# EAGLE board boardTracesBottom (EAGLE 9.4.1)
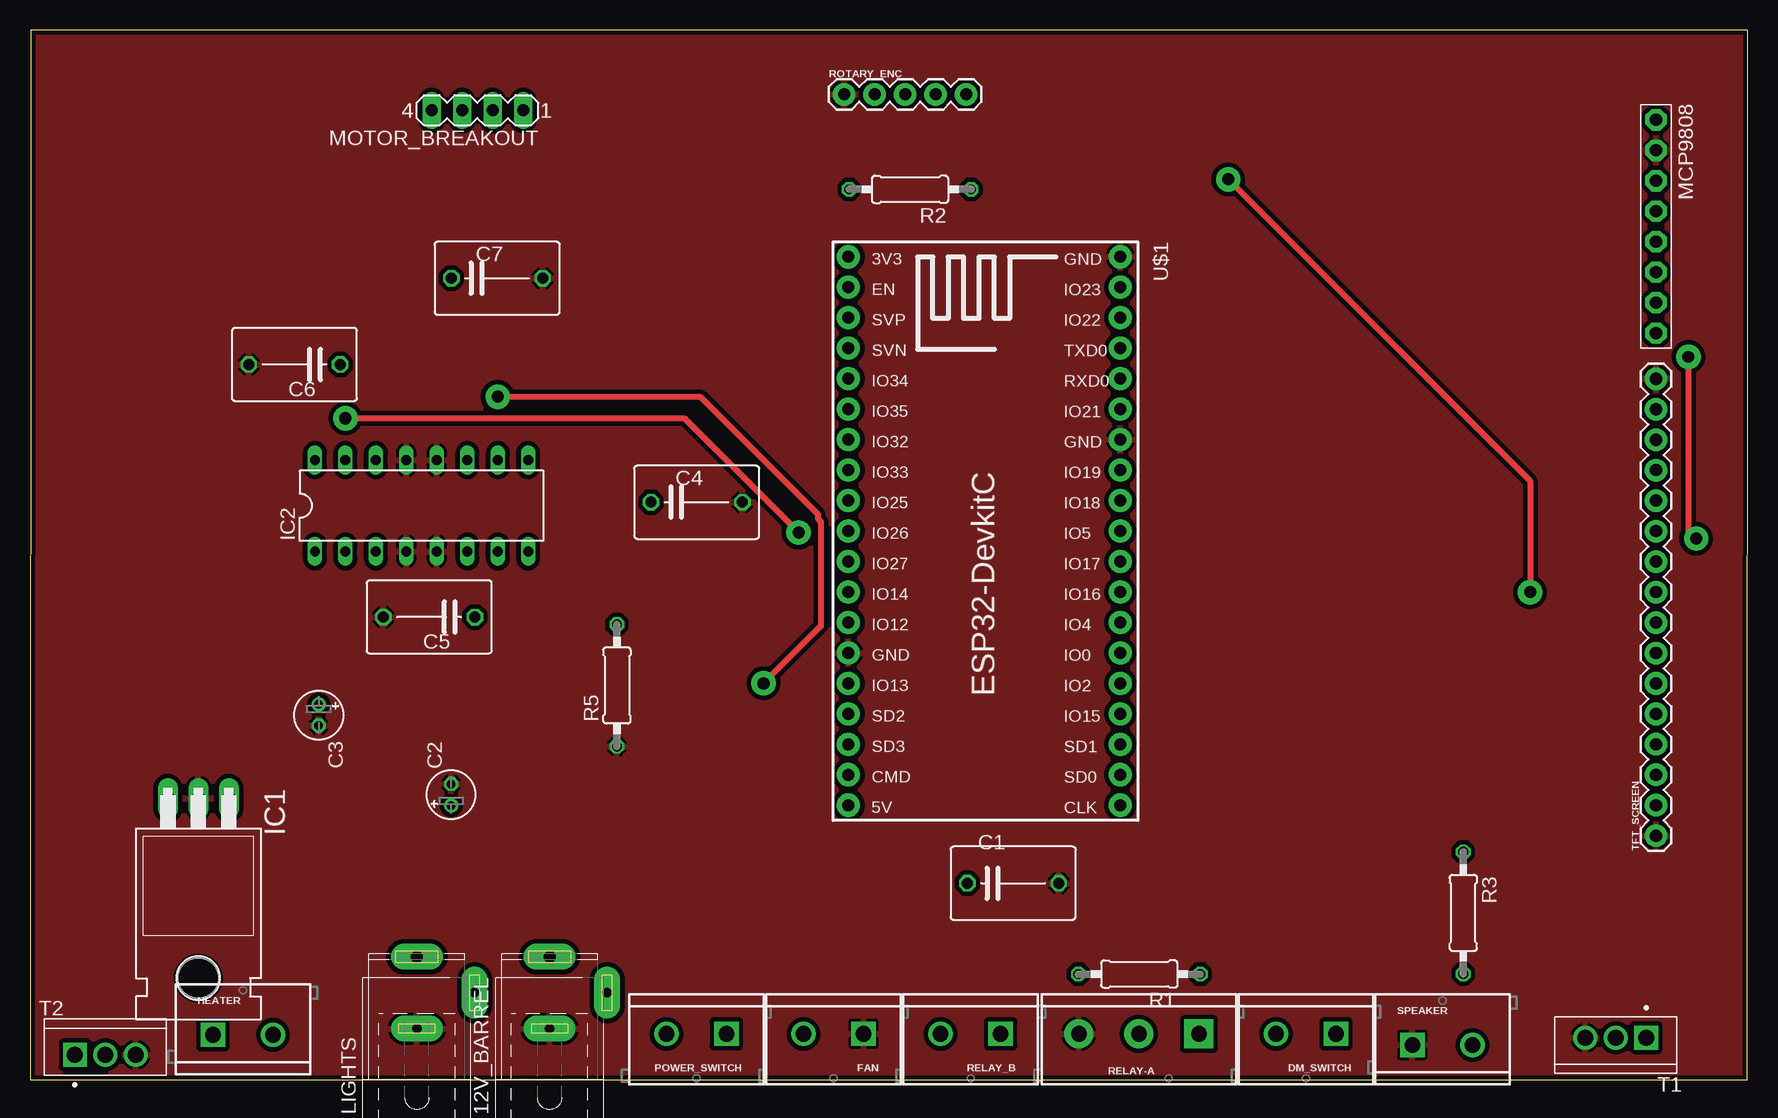
[diagram p0: board, top side]
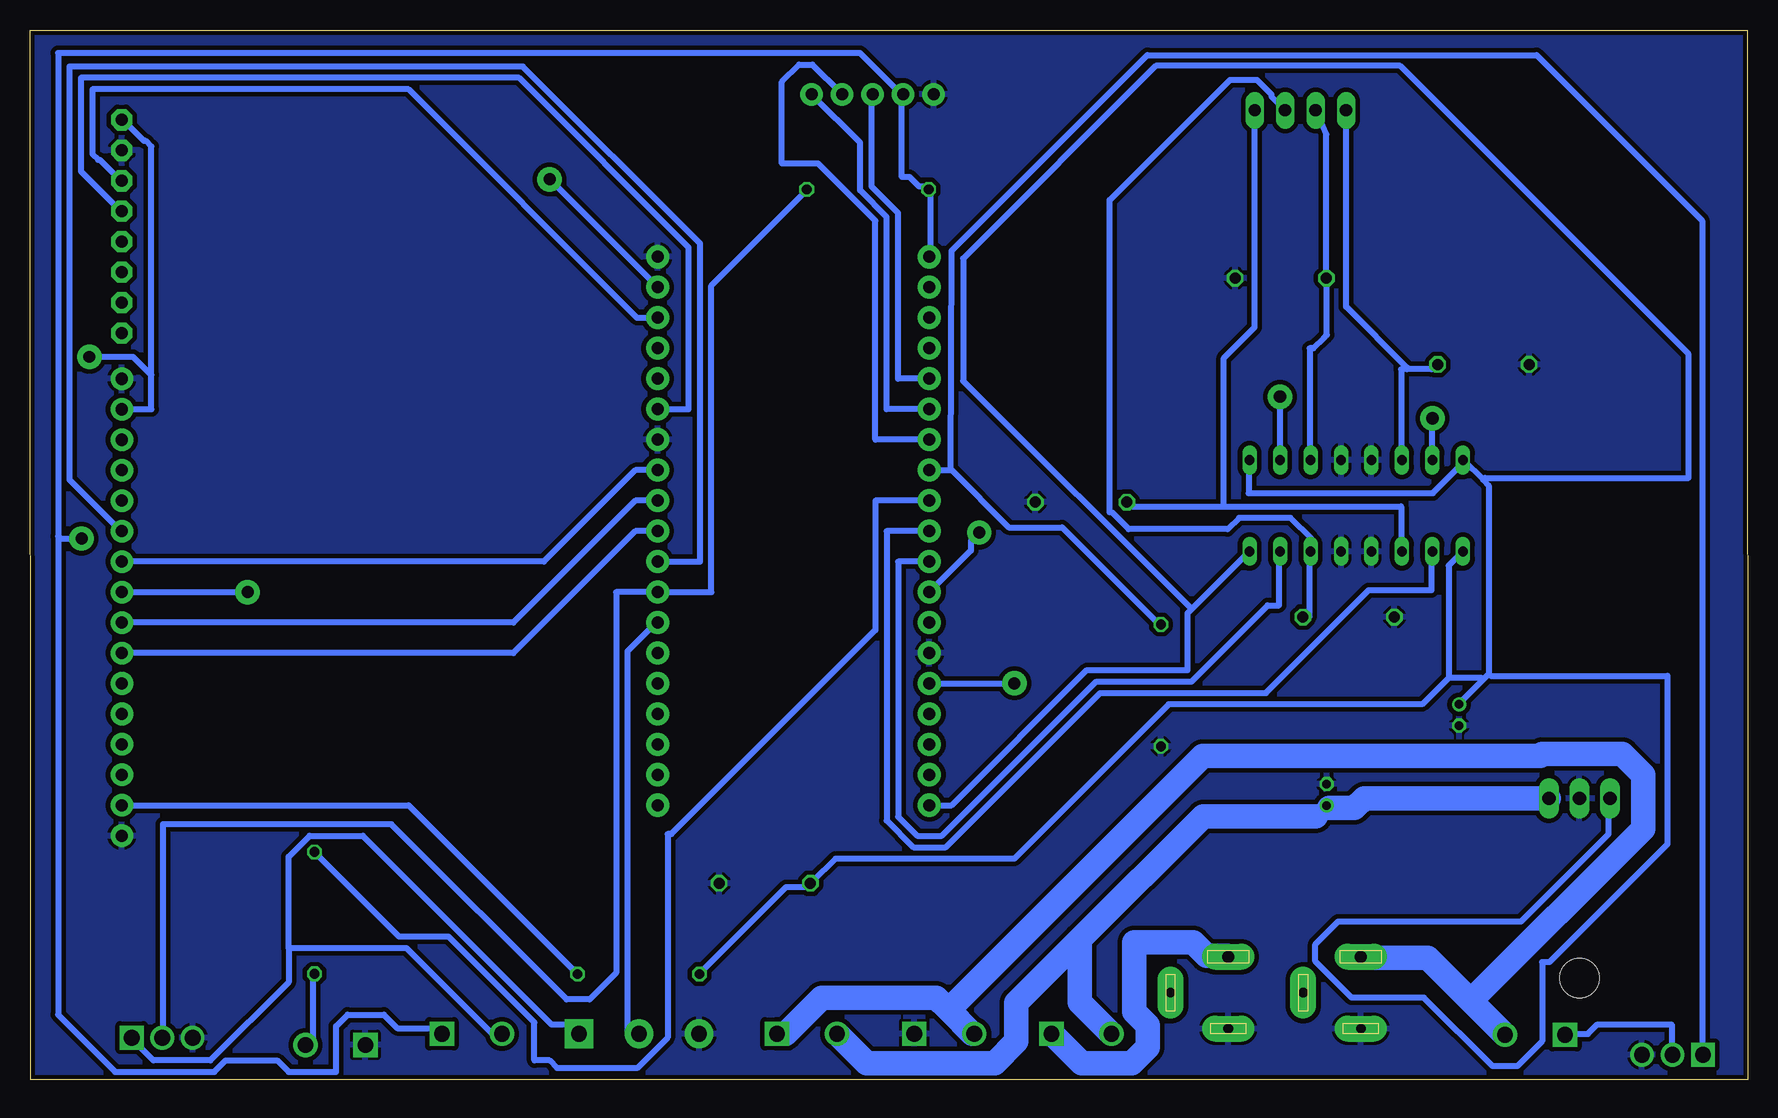
[diagram p1: board, bottom side, seen from below]

Size 143.15 x 87.5 mm. Coordinates in mm from the lower left corner, seen from the top.
Outline: 0,0 143.1,0 143.15,87.5 0.05,87.5 0,0
Copper layers (1*16): Top 0.0178mm / dielectric 59mil / Bottom 0.0178mm
Design rules "epl-lpkf": minimum track width 8mil, minimum drill 0.35mm, track to track 8mil, track to pad 8mil, pad to pad 8mil, via to via 8mil, smd to smd 8mil, copper to edge 15mil, drill to drill 15mil, minimum pad ring 8mil, minimum via ring 8mil, stop-mask expansion 3mil, vias tented up to drill 0mil, thermal gap 10mil
Net classes: 0 default: width 0.508 mm, drill 1.5 mm, clearance 0.381 mm; 1 thick: width 1.27 mm, drill 1.199 mm, clearance 0.381 mm; 2 high current: width 4.318 mm, drill 1.199 mm, clearance 0.381 mm

## Footprints (pad centres in the part's own frame; a part is rotated, then mirrored left to right if it is on the bottom)
SPC4077 = drill 0.8 pad 2.184 long: 1 -3,0; 2 0,-4.8 | drill 1 pad 2.184 long: 3 3,0
C075-063X106 = drill 0.914 octagon: 1 -3.81,0; 2 3.81,0
E1,8-4 = drill 0.711 pad 1.168: + -0.889,0 | drill 0.711 pad 1.168 octagon: - 0.889,0
SCREWTERMINAL-5MM-2 = drill 1.3 pad 2.032 square: 1 0,0 | drill 1.3 pad 2.032: 2 5,0
TO220H = drill 1.118 long: 1 -2.54,-10.16; 2 0,-10.16; 3 2.54,-10.16 | hole 3.302: 0,4.826
DIL16 = drill 0.813 long: 1 -8.89,-3.81; 2 -6.35,-3.81; 3 -3.81,-3.81; 4 -1.27,-3.81; 5 1.27,-3.81; 6 3.81,-3.81; 7 6.35,-3.81; 8 8.89,-3.81; 9 8.89,3.81; 10 6.35,3.81; 11 3.81,3.81; 12 1.27,3.81; 13 -1.27,3.81; 14 -3.81,3.81; 15 -6.35,3.81; 16 -8.89,3.81
1X08-BIG = drill 1.016 pad 1.778 octagon: 1 -8.89,0; 2 -6.35,0; 3 -3.81,0; 4 -1.27,0; 5 1.27,0; 6 3.81,0; 7 6.35,0; 8 8.89,0
MA04-1 = drill 1.016 long: 1 -3.81,0; 2 -1.27,0; 3 1.27,0; 4 3.81,0
0207/10 = drill 0.813 octagon: 1 -5.08,0; 2 5.08,0
SCREWTERMINAL-5MM-3 = drill 1.3 pad 2.413 square: 1 0,0 | drill 1.3 pad 2.413: 2 5,0; 3 10,0
1X05 = drill 1.016 pad 1.88: 1 0,0; 2 2.54,0; 3 5.08,0; 4 7.62,0; 5 10.16,0
TRANS_RFP30N06LE = drill 1.32 square: 1 -2.54,0 | drill 1.32: 2 0,0; 3 2.54,0
1X16 = drill 1.016 pad 1.88: 1 0,0; 2 2.54,0; 3 5.08,0; 4 7.62,0; 5 10.16,0; 6 12.7,0; 7 15.24,0; 8 17.78,0; 9 20.32,0; 10 22.86,0; 11 25.4,0; 12 27.94,0; 13 30.48,0; 14 33.02,0; 15 35.56,0; 16 38.1,0
ESP32-DEVKITC = drill 1 pad 1.93: 1 -22.87,-11.42; 2 -20.33,-11.42; 3 -17.79,-11.42; 4 -15.25,-11.42; 5 -12.71,-11.42; 6 -10.17,-11.42; 7 -7.63,-11.42; 8 -5.09,-11.42; 9 -2.55,-11.42; 10 -0.01,-11.42; 11 2.53,-11.42; 12 5.07,-11.42; 13 7.61,-11.42; 14 10.15,-11.42; 15 12.69,-11.42; 16 15.23,-11.42; 17 17.77,-11.42; 18 20.31,-11.42; 19 22.85,-11.42; 20 22.85,11.23; 21 20.31,11.23; 22 17.77,11.23; 23 15.23,11.23; 24 12.69,11.23; 25 10.15,11.23; 26 7.61,11.23; 27 5.07,11.23; 28 2.53,11.23; 29 -0.01,11.23; 30 -2.55,11.23; 31 -5.09,11.23; 32 -7.63,11.23; 33 -10.17,11.23; 34 -12.71,11.23; 35 -15.25,11.23; 36 -17.79,11.23; 37 -20.33,11.23; 38 -22.87,11.23

## Placement (x,y rotation side)
12V_BARREL  [SPC4077]  43.3,7.24 90 top
C1  .1uF  [C075-063X106]  81.92,16.37 0 top
C2  10uF  [E1,8-4]  35.1,23.74 90 top
C3  10uF  [E1,8-4]  24.06,30.39 270 top
C4  0.1u  [C075-063X106]  55.56,48.13 0 top
C5  0.1u  [C075-063X106]  33.26,38.56 180 top
C6  0.1u  [C075-063X106]  22.04,59.61 180 top
C7  0.1u  [C075-063X106]  38.92,66.81 0 top
DM_SWITCH  [SCREWTERMINAL-5MM-2]  108.83,3.81 180 top
FAN  [SCREWTERMINAL-5MM-2]  69.46,3.81 180 top
HEATER  [SCREWTERMINAL-5MM-2]  15.24,3.73 0 top
IC1  7805T  [TO220H]  14.03,13.28 180 top
IC2  L293D  [DIL16]  32.63,47.84 0 top
LIGHTS  [SPC4077]  32.25,7.24 90 top
MCP9808  [1X08-BIG]  135.5,71.12 270 top
MOTOR_BREAKOUT  [MA04-1]  37.29,80.8 180 top
POWER_SWITCH  [SCREWTERMINAL-5MM-2]  58.03,3.81 180 top
R1  220  [0207/10]  92.44,8.79 180 top
R2  10k  [0207/10]  73.34,74.21 180 top
R3  220  [0207/10]  119.44,13.89 270 top
R5  10k  [0207/10]  48.91,32.86 90 top
RELAY-A  [SCREWTERMINAL-5MM-3]  97.4,3.81 180 top
RELAY_B  [SCREWTERMINAL-5MM-2]  80.89,3.81 180 top
ROTARY_ENC  [1X05]  67.85,82.14 0 top
SPEAKER  [SCREWTERMINAL-5MM-2]  115.2,2.89 0 top
T1  RFP30N06LE  [TRANS_RFP30N06LE]  132.14,3.49 180 top
T2  RFP30N06LE  [TRANS_RFP30N06LE]  6.28,2.07 0 top
TFT_SCREEN  [1X16]  135.5,20.32 90 top
U$1  ESP32DEVKITC  [ESP32-DEVKITC]  79.62,45.72 270 top

## Library data of the parts
12V_BARREL LIGHTS = con-jack; OC_FARNELL: unknown; OC_NEWARK: unknown
C1-C7 = rcl; SPICEPREFIX: C
DM_SWITCH FAN HEATER POWER_SWITCH RELAY_B SPEAKER = SparkFun-Connectors; SF_SKU: PRT-08432
IC1 = linear
IC2 = st-microelectronics; MPN: L293D; OC_FARNELL: 9589619; OC_NEWARK: 56P8249
MCP9808 = adafruit
MOTOR_BREAKOUT = con-lstb; OC_FARNELL: unknown; OC_NEWARK: unknown
R1-R3 R5 = rcl; SPICEPREFIX: R
RELAY-A = SparkFun-Connectors; PROD_ID: CONN-10134; SF_SKU: PRT-08433
ROTARY_ENC TFT_SCREEN = SparkFun-Connectors
T1 T2 = RFP30N06LE; AVAILABILITY: Unavailable; MF: ON Semiconductor; MP: RFP30N06LE; PACKAGE: TO-220 Intersil; PRICE: None
U$1 = ESP32-DEVKITC

## Nets
+3V3: DM_SWITCH.1 MCP9808.1 R2.2 ROTARY_ENC.2 TFT_SCREEN.15 U$1.1
+5V: C1.1 C3.+ IC1.3 IC2.1 IC2.8 IC2.9 IC2.16 R1.2 U$1.19
GND: 12V_BARREL.1 C1.2 C2.- C3.- C4.2 C5.2 C6.2 C7.2 FAN.1 IC1.2 IC2.4 IC2.5 IC2.12 IC2.13 LIGHTS.1 MCP9808.2 R5.1 RELAY-A.3 ROTARY_ENC.1 SPEAKER.1 T1.3 T2.3 TFT_SCREEN.1 TFT_SCREEN.16 U$1.14 U$1.32 U$1.38
N$1: TFT_SCREEN.9 U$1.37
N$2: IC2.15 U$1.12
N$3 [thick]: 12V_BARREL.3 POWER_SWITCH.1
N$4: HEATER.1 T2.2
N$5: IC2.7 U$1.11
N$6: R3.2 SPEAKER.2
N$7: C5.1 IC2.6 MOTOR_BREAKOUT.2
N$8: DM_SWITCH.2 RELAY-A.1 T1.1
N$9: R2.1 T1.2 U$1.27
N$10: MCP9808.3 U$1.36
N$11: MCP9808.4 U$1.33
N$13: IC2.2 U$1.10
N$14: R5.2 T2.1 U$1.8
N$15: C4.1 IC2.3 MOTOR_BREAKOUT.1
N$16: RELAY-A.2 U$1.26
N$17: R1.1 TFT_SCREEN.2
N$18: ROTARY_ENC.3 U$1.5
N$19: ROTARY_ENC.4 U$1.7
N$20: ROTARY_ENC.5 U$1.6
N$21: TFT_SCREEN.11 U$1.28
N$22: TFT_SCREEN.10 U$1.31
N$23: C7.1 IC2.11 MOTOR_BREAKOUT.3
N$24: TFT_SCREEN.8 U$1.30
N$25: TFT_SCREEN.7 U$1.29
N$26: R3.1 U$1.9
N$27: C6.1 IC2.14 MOTOR_BREAKOUT.4
N$28 [thick]: FAN.2 HEATER.2 LIGHTS.3 RELAY_B.1
N$29: IC2.10 U$1.15
V+ [thick]: C2.+ IC1.1 POWER_SWITCH.2 RELAY_B.2

## Tracks (layer width: path | path; a pad name or v marks a point on that pad's centre or on a via)
+3V3  (via drill 0.99 pad 2.03, 1.02 pad 2.03)
  Top 0.508: 138.25,60.2 v138.2,60.25 138.2,45.75 v138.85,45.1 138.8,45.05
  Bottom 0.508: U$1.1 68.1,68.74 68.1,74.14 R2.2 68.26,74.45 69.06,74.45 69.85,75.25 70.48,75.25 70.48,82.07 ROTARY_ENC.2 70.64,82.23 73.98,85.57 140.81,85.57 140.81,45.3 | 140.81,45.3 140.81,5.4 136.05,0.64 127.79,0.64 126.84,1.59 122.56,1.59 121.6,0.64 117.63,0.64 117.63,4.45 116.68,5.4 113.67,5.4 112.55,4.29 109.38,4.29 108.9,3.81 DM_SWITCH.1 | 133.03,58.73 133.03,77.79 133.51,78.26 133.67,78.26 135.41,80.01 MCP9808.1 | TFT_SCREEN.15 133.03,55.88 133.03,58.73 | 133.03,58.73 134.55,60.25 v138.2,60.25 | 140.81,45.3 140.61,45.1 v138.85,45.1
+5V
  Bottom 0.508: 46.35,39.21 46.67,38.89 46.67,34.13 55.09,34.13 66.36,22.86 68.1,22.86 U$1.19 | 46.35,39.21 41.59,43.97 IC2.8 | R1.2 87.31,8.89 80.17,16.03 78.58,16.03 78.26,16.35 C1.1 77.95,16.51 76.04,18.41 61.12,18.41 48.26,31.27 27.15,31.27 24.92,33.5 | 21.59,33.81 22.07,33.34 | 22.07,33.34 23.97,31.43 C3.+ | 23.65,43.97 IC2.1 24.92,42.85 24.92,33.5 | 23.65,51.59 22.07,50.01 | 23.65,51.59 IC2.16 | IC2.9 41.59,51.59 41.59,48.9 26.25,48.9 23.65,51.49 23.65,51.59 | IC1.3 11.59,23.34 11.59,20.48 18.89,13.18 34.13,13.18 36.04,11.27 36.04,9.84 33.02,6.83 26.99,6.83 21.27,1.11 19.21,1.11 17.13,3.19 17.13,9.79 16.54,9.79 6.71,19.61 6.71,33.66 21.43,33.66 21.59,33.81 | 24.92,33.5 22.23,33.5 22.07,33.34 | 46.35,39.21 65.38,58.24 65.38,68.45 49.32,84.51 28.97,84.51 4.94,60.48 4.94,50.16 21.91,50.16 22.07,50.01 | 22.07,50.01 21.59,49.53 21.59,33.81
GND
  pour Top: 0.05,87.45 0.05,0 143.1,0 143.1,87.45
  pour Bottom: 0.05,87.45 0.05,0 143.1,0 143.1,87.45
N$1  (via drill 1.02 pad 2.03)
  Top 0.508: 100.2,75.05 v99.85,75.05 125.01,49.89 v125.01,40.64 v125,40.65
  Bottom 0.508: U$1.37 v99.85,75.05 | TFT_SCREEN.9 v125.01,40.64
N$2  (via drill 1.02 pad 2.03)
  Top 0.508: v26.28,55.13 54.52,55.13 v64.05,45.6
  Bottom 0.508: U$1.12 64.75,44.1 64.75,44.9 v64.05,45.6 | IC2.15 v26.28,55.13
N$3
  Bottom 1.27: 57.94,3.81 POWER_SWITCH.1 | 43.34,10.32 12V_BARREL.3
  Bottom 2.032: 57.94,3.81 55.49,1.36 51.34,1.36 50.01,2.7 50.01,4.52 51.12,5.63 51.12,11.43 46.2,11.43 45.09,10.32 43.34,10.32
N$4
  Bottom 0.508: T2.2 6.35,2.22 6.35,4.6 12.54,4.6 13.34,3.81 15.24,3.81 HEATER.1
N$5
  Bottom 0.508: IC2.7 39.05,43.97 39.05,39.53 40.01,39.53 46.35,33.18 54.29,33.18 67.15,20.32 69.22,20.32 70.8,21.91 70.8,43.18 68.26,43.18 U$1.11
N$6
  Bottom 0.508: R3.2 119.54,8.73 119.54,3.02 120.17,3.02 SPEAKER.2
N$7
  Bottom 0.508: C5.1 36.99,38.58 36.51,38.58 36.51,43.97 IC2.6 36.51,44.29 36.35,44.29 36.35,45.09 38.1,46.83 42.39,46.83 43.34,45.88 51.59,45.88 53.02,47.31 53.18,47.31 53.18,73.32 43.15,83.35 40.91,83.35 39.7,82.14 39.7,81.94 MOTOR_BREAKOUT.2
N$8
  Bottom 0.508: 121.6,10.95 121.6,8.1 128.11,1.59 132.87,1.59 134.62,3.33 T1.1 | 121.6,10.95 111.76,10.95 104.62,3.81 DM_SWITCH.2 | 121.6,10.95 121.6,18.57 119.86,20.32 115.41,20.32 99.69,4.6 98.27,4.6 97.47,3.81 RELAY-A.1
N$9
  Bottom 0.508: R2.1 78.42,74.14 86.36,66.2 86.36,40.64 90.81,40.64 U$1.27 90.96,40.64 94.3,40.64 94.3,8.89 96.52,6.67 98.42,6.67 113.03,21.27 132.08,21.27 132.08,3.49 T1.2
N$10
  Bottom 0.508: MCP9808.3 135.57,74.93 137.32,76.68 137.48,76.68 137.95,77.15 137.95,82.55 111.6,82.55 92.55,63.5 90.96,63.5 U$1.36
N$11
  Bottom 0.508: MCP9808.4 135.57,72.39 138.91,75.72 138.91,83.5 102.39,83.5 88.27,69.37 88.27,55.88 90.81,55.88 U$1.33
N$13
  Bottom 0.508: IC2.2 26.35,43.97 26.35,41.8 26.35,40.8 31.59,40.8 40.16,32.23 53.98,32.23 66.83,19.37 69.53,19.37 71.75,21.59 71.75,45.72 68.26,45.72 U$1.10
N$14
  Bottom 0.508: 66.36,50.8 66.43,50.87 66.35,69.1 50.04,85.41 17.6,85.41 3.81,71.62 3.81,2.22 T2.1 | 66.36,50.8 61.59,46.04 57.15,46.04 49.05,37.94 R5.2 | 66.36,50.8 68.1,50.8 U$1.8
N$15
  Bottom 0.508: 43.66,47.78 51.28,47.78 51.59,48.1 C4.1 | 43.66,47.78 28.89,47.78 28.89,44.13 IC2.3 | 43.66,47.78 43.66,60.17 41.1,62.72 MOTOR_BREAKOUT.1
N$16
  Bottom 0.508: RELAY-A.2 93.34,3.81 93.34,35.72 90.96,38.1 U$1.26
N$17
  Bottom 0.508: TFT_SCREEN.2 111.6,22.86 97.63,8.89 R1.1
N$18
  Bottom 0.508: ROTARY_ENC.3 73.03,82.07 73.03,74.45 70.8,72.23 70.8,58.42 68.26,58.42 U$1.5
N$19
  Bottom 0.508: ROTARY_ENC.4 75.56,82.23 77.95,84.61 79.06,84.61 80.49,83.19 80.49,76.36 77.47,76.36 72.71,71.6 72.71,53.34 68.26,53.34 U$1.7
N$20
  Bottom 0.508: ROTARY_ENC.5 77.95,82.07 73.98,78.11 73.98,74.14 71.75,71.91 71.75,55.88 68.26,55.88 U$1.6
N$21
  Bottom 0.508: TFT_SCREEN.11 135.57,45.72 139.86,50.01 139.86,84.45 102.08,84.45 87.31,69.69 87.31,43.18 90.81,43.18 U$1.28
N$22
  Bottom 0.508: TFT_SCREEN.10 100.33,43.18 92.71,50.8 90.96,50.8 U$1.31
N$23
  Bottom 0.508: 35.08,62.07 35.11,62.05 | IC2.11 36.51,51.75 36.51,60.96 36.2,60.96 35.35,61.8 35.11,62.05 | MOTOR_BREAKOUT.3 35.11,78.81 C7.1 35.11,62.05
N$24
  Bottom 0.508: TFT_SCREEN.8 102.87,38.1 92.71,48.26 90.96,48.26 U$1.30
N$25
  Bottom 0.508: TFT_SCREEN.7 102.87,35.56 92.71,45.72 90.96,45.72 U$1.29
N$26
  Bottom 0.508: R3.1 119.38,18.89 112.39,11.91 108.27,11.91 101.12,4.76 101.12,1.59 99.85,1.59 99.22,0.95 92.55,0.95 90.01,3.49 90.01,20.48 89.69,20.48 72.71,37.47 72.71,48.26 68.26,48.26 U$1.9
N$27
  Bottom 0.508: 28.42,59.21 26.35,59.21 26.04,59.53 25.88,59.53 C6.1 | 28.42,59.21 28.89,59.21 28.89,51.75 IC2.14 | MOTOR_BREAKOUT.4 33.48,64.44 28.42,59.37 28.42,59.21
N$28
  Bottom 1.27: 32.23,10.16 LIGHTS.3 | 17.14,27.15 17.3,26.99
  Bottom 2.032: 66.6,5.79 67.63,6.83 77.15,6.83 80.17,3.81 RELAY_B.1 | 66.6,5.79 64.61,3.81 FAN.2 | 23.07,6.56 26.67,10.16 32.23,10.16 | 23.07,6.56 HEATER.2 | 66.6,5.79 45.4,26.99 17.3,26.99 | 17.14,27.15 10.48,27.15 8.73,25.4 8.73,20.9 23.07,6.56
N$29  (via drill 1.02 pad 2.03)
  Top 0.508: v38.98,56.93 55.85,56.93 65.65,47.13 65.65,46.75 65.9,46.5 65.9,37.81 v61.12,33.03
  Bottom 0.508: IC2.10 v38.98,56.93 39.05,57 | U$1.15 v61.12,33.03
V+
  Bottom 1.27: RELAY_B.2 | 34.88,22.63 C2.+ 36,21.95
  Bottom 2.032: RELAY_B.2 73.43,1.36 62.77,1.36 60.96,3.17 60.96,6.39 55.67,11.68 | IC1.1 31.98,23.44 32.79,22.63 34.88,22.63 | 36,21.95 45.4,21.95 55.67,11.68 | 55.67,11.68 55.67,6.45 POWER_SWITCH.2